# Altium PCB PCB2.PcbDoc
Units mil, origin at the board's own origin, x right, y up, seen from the top; angles counter-clockwise.
Board outline 6000 x 4000 mil, 2 copper layers (Top Layer, Bottom Layer); 70 components, 62 nets, 350 pads, 0 vias.
Unrouted connection lines stored in the file: 244.
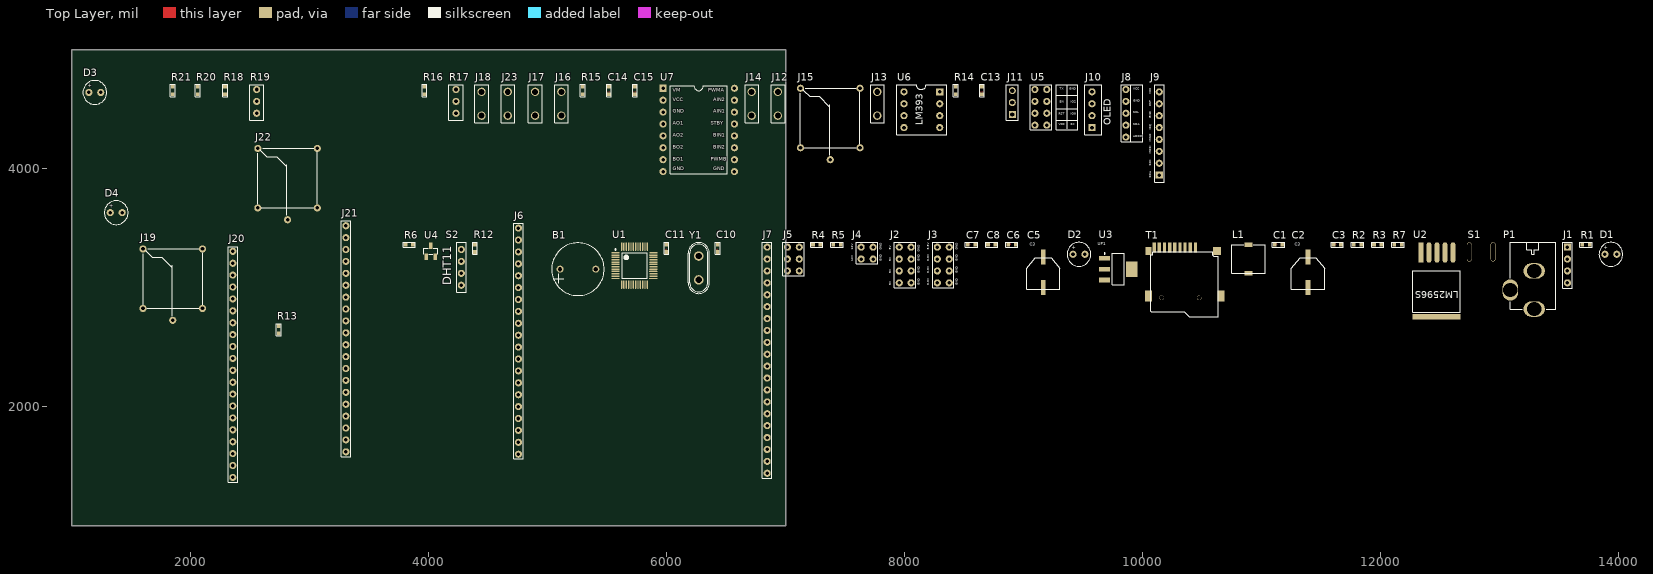
[diagram p0: Top Layer view]
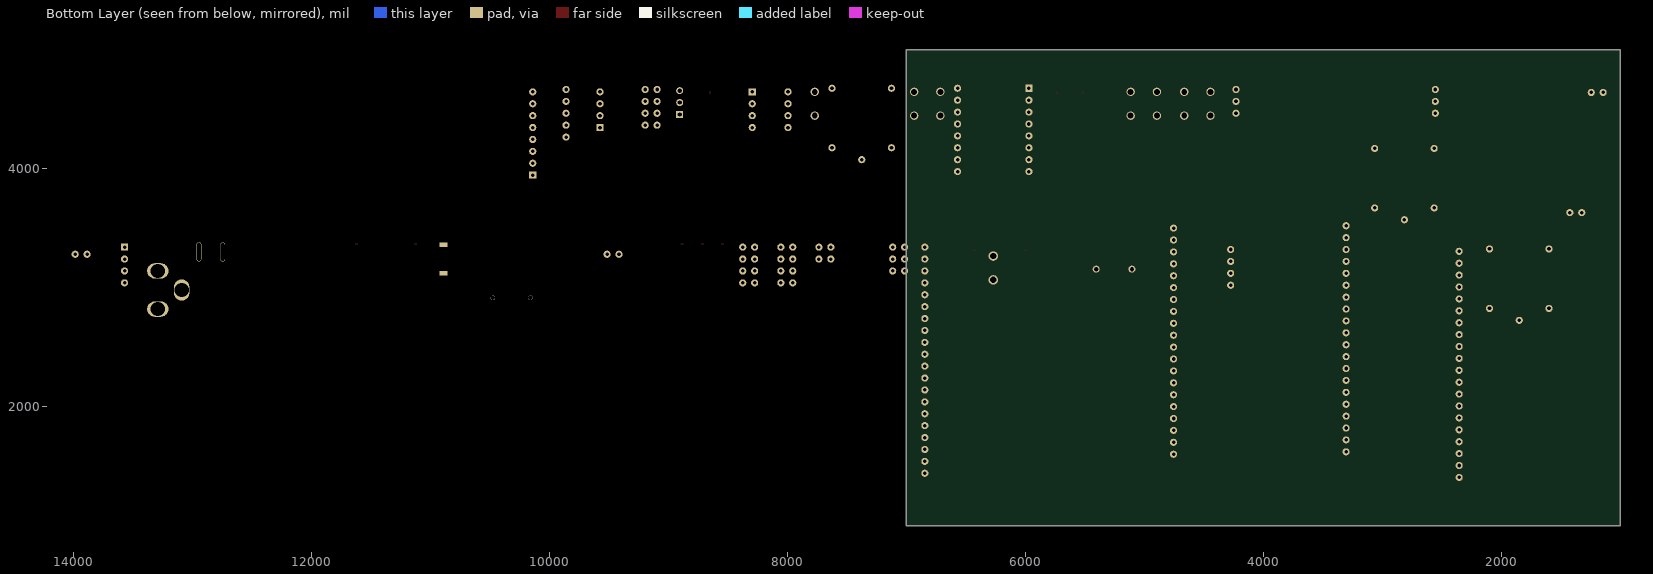
[diagram p1: Bottom Layer view, seen from below]

## Layer stack, top to bottom
Top Solder: solder mask 0.4, Solder Resist, Dk 3.5
Top Layer: signal copper 1.4
Dielectric 1: dielectric 12.6, FR-4, Dk 4.8
Bottom Layer: signal copper 1.4
Bottom Solder: solder mask 0.4, Solder Resist, Dk 3.5

## Board outline
1000,1000 7000,1000 7000,5000 1000,5000

## Design rules (kind name [scope] priority, off if disabled: settings)
Clearance [All] p1: gap=10
PolygonConnect [All] p1: connectstyle=Relief reliefconductorwidth=10 reliefentries=4 polygonreliefangle="90 Angle" airgapwidth=10
RoutingVias [All] p1: holewidth=28 width=50 viastyle="Through Hole" minholewidth=28 minwidth=50 maxholewidth=28 maxwidth=50
SolderMaskExpansion [All] p1: expansion=4
Width [All] p1: maxlimit=10 minlimit=10 preferedwidth=10
29 further rules are at their usual default settings.

## Classes and differential pairs
component class Sheet2: C13 C14 C15 D3 D4 J8 J9 J10 J11 J12 J13 J14 J15 J16 J17 J18 J19 J22 J23 R14 R15 R16 R17 R18 R19 R20 R21 U5 U6 U7
component class Sheet1: B1 C1 C2 C3 C5 C6 C7 C8 C10 C11 D1 D2 J1 J2 J3 J4 J5 J6 J7 J20 J21 L1 P1 R1 R2 R3 R4 R5 R6 R7 R12 R13 S1 S2 T1 U1 U2 U3 U4 Y1

## Components (designator, comment, footprint, x,y, rotation, side; value= is the part's Value field where it differs from the comment)
B1 "BEEP" BEEP-9.5X5.5 5205,3155 r0 top
C1 "104" CAP_0603_FIRE 11110,3360 r0 top
C2 "220UF35V" CAP+_47UF_FIRE 11390,3145 r0 top
C3 "0.1UF" CAP_0603_FIRE 11605,3360 r0 top
C5 "220UF35V" CAP+_47UF_FIRE 9165,3145 r0 top
C6 "0.1UF" CAP_0603_FIRE 8870,3360 r0 top
C7 "22UF" CAP_0603_FIRE 8530,3360 r0 top
C8 "0.1UF" CAP_0603_FIRE 8700,3360 r0 top
C10 "20P" CAP_0603_FIRE 6430,3300 r90 top
C11 "20P" CAP_0603_FIRE 6000,3300 r90 top
C13 "104" CAP_0603_FIRE 8650,4625 r90 top
C14 "104" CAP_0603_FIRE 5515,4625 r90 top
C15 "104" CAP_0603_FIRE 5735,4625 r90 top
D1 "LED" LED_Z 13885,3280 r0 top
D2 "ES2D" LED_Z 9415,3280 r0 top
D3 "LED" LED_Z 1145,4640 r0 top
D4 "LED" LED_Z 1325,3630 r0 top
J1 "SWD" SWD 13570,3340 r0 top
J2 "5V" 5V 7955,3340 r0 top
J3 "3.3V" 3.3V 8275,3340 r0 top
J4 "12V" 12V 7635,3340 r0 top
J5 "BOOT" BOOT 7015,3340 r0 top
J6 "Hander_20" Hander_20 4755,3500 r0 top
J7 "Hander_20" Hander_20 6845,3340 r0 top
J8 "GY-302" GY 9860,4665 r0 top
J9 "RFID" RFID 10140,3945 r90 top
J10 "OLED" OLED 9575,4345 r90 top
J11 "HC-SR501" HDR1X3 8905,4455 r90 top
J12 "K1" port_2 6935,4445 r90 top
J13 "电磁阀" port_2 7770,4445 r90 top
J14 "Port" port_2 6715,4445 r90 top
J15 "relay" relay 7125,4675 r0 top
J16 "电机" port_2 5115,4445 r90 top
J17 "电机" port_2 4895,4445 r90 top
J18 "电磁阀" port_2 4445,4445 r90 top
J19 "relay" relay 1600,3325 r0 top
J20 "Hander_20" Hander_20 2355,3305 r0 top
J21 "Hander_20" Hander_20 3305,3520 r0 top
J22 "relay" relay 2565,4170 r0 top
J23 "电磁阀" port_2 4665,4445 r90 top
L1 "L" L 10890,3360 r0 top
P1 "Power" POWER 13090,2980 r0 top
R1 "1.5K" R_0603 13695,3360 r0 top
R2 "47K" R_0603 11775,3360 r0 top
R3 "47K" R_0603 11945,3360 r0 top
R4 "10K" R_0603 7230,3360 r0 top
R5 "10K" R_0603 7400,3360 r0 top
R6 "RES" R_0603 3805,3360 r0 top
R7 "47K" R_0603 12115,3360 r0 top
R12 "1K" R_0603 4390,3300 r90 top
R13 "10K" R_0603 2740,2615 r90 top
R14 "10K" R_0603 8430,4625 r90 top
R15 "10K" R_0603 5295,4625 r90 top
R16 "1k" R_0603 3965,4625 r90 top
R17 "103" RES_R 4230,4665 r0 top
R18 "1k" R_0603 2290,4625 r90 top
R19 "103" RES_R 2555,4665 r0 top
R20 "10K" R_0603 2060,4625 r90 top
R21 "10K" R_0603 1850,4625 r90 top
S1 "" SWITCH 12745,3300 r0 top
S2 "DHT11" DHT11 4275,3020 r90 top
T1 "TF" TF_CARD 10050,2930 r0 top
U1 "stm32c8t6" LQFP48_N 5730,3185 r0 top
U2 "LM2596" LM2596 12340,3295 r90 top
U3 "AMS1117" AMS-1117-3.3 9795,3155 r0 top
U4 "9014" SOT-23 3980,3260 r0 top
U5 "ESP8266" ESP8266 9095,4665 r0 top
U6 "LM393" LM393 7995,4645 r0 top
U7 "TB6612" TB6612 5970,4675 r0 top
Y1 "8MHZ" XTAL_socket 6270,3165 r90 top

## Footprints (in the part's own frame and the unit in brackets; to place one, negate y for a bottom-side part, rotate by r counter-clockwise, add the part's x,y. Pads: shape width x height; smd on the part's side, far side on the other; paste and mask are expansions set on the pad)
3.3V [mil]
  round 60 hole 30: 1(0,0) 2(0,-100) 3(0,-200) 4(0,-300) 5(100,-300) 6(100,-200) 7(100,-100) 8(100,0)
  silkscreen extent -40,-340 140,40
5V [mil]
  round 60 hole 30: 1(0,0) 2(0,-100) 3(0,-200) 4(0,-300) 5(100,0) 6(100,-100) 7(100,-200) 8(100,-300)
  silkscreen extent -40,-340 140,40
12V [mil]
  round 60 hole 30: 1(0,0) 2(0,-100) 3(100,0) 4(100,-100)
  silkscreen extent -40,-140 140,40
AMS-1117-3.3 [mm]
  rect 2.4x1 smd: 1(-2.9,2.3) 2(-2.9,0) 3(-2.9,-2.3)
  rect 2.4x3.3 smd: 4(2.9,0)
  silkscreen extent -3.02,-3.35 1.3,3.47
BEEP-9.5X5.5 [mm]
  round 1.5 hole 0.9: 1(-2.54,0) 2(5.08,0)
  silkscreen extent -4.34,-5.61 6.88,5.61
BOOT [mil]
  round 60 hole 30: 1(0,0) 2(0,-100) 3(0,-200) 4(100,-200) 5(100,-100) 6(100,0)
  silkscreen extent -40,-240 140,40
CAP+_47UF_FIRE [mm]
  rect 1x3.2 smd: 1(0,2.8) 2(0,-3.683)
  silkscreen extent -3.56,-4.06 3.56,2.7
CAP_0603_FIRE [mm]
  rect 0.8x0.8 smd: 1(0,0) 2(1.6,0)
  silkscreen extent -0.5,-0.5 2.1,0.5
DHT11 [mil]
  round 60 hole 30: 1(0,0) 2(100,0) 3(200,0) 4(300,0)
  silkscreen extent -60,-40 360,40
ESP8266 [mil]
  round 60 hole 30: 1(0,-300) 2(0,-200) 3(0,-100) 4(0,0) 5(100,-300) 6(100,-200) 7(100,-100) 8(100,0)
  silkscreen extent -40,-340 360,40
GY [mil]
  round 60 hole 30: 1(0,0) 2(0,-100) 3(0,-200) 4(0,-300) 5(0,-400)
  silkscreen extent -40,-440 140,40
Hander_20 [mil]
  round 60 hole 30: 1(0,0) 2(0,-100) 3(0,-200) 4(0,-300) 5(0,-400) 6(0,-500) 7(0,-600) 8(0,-700) 9(0,-800) 10(0,-900) 11(0,-1000) 12(0,-1100) 13(0,-1200) 14(0,-1300) 15(0,-1400) 16(0,-1500) 17(0,-1600) 18(0,-1700) 19(0,-1800) 20(0,-1900)
  silkscreen extent -40,-1940 40,40
HDR1X3 [mm] "Connector; Header; 3 Position"
  rect 1.5x1.5 hole 0.9: 1(0,0)
  round 1.5 hole 0.9: 2(2.54,0) 3(5.08,0)
  silkscreen extent -1.27,-1.27 6.35,1.27
L [mm]
  rect 1.8x1 all layers, no hole: 1(0,0) 2(0,-6.096)
  silkscreen extent -3.56,-6.1 3.56,0
LED_Z [mil]
  round 60 hole 30: 1(0,0) 2(100,0)
  silkscreen extent -50,-100 150,100
LM393 [mil]
  round 60 hole 30: 1(0,0) 2(0,-100) 3(0,-200) 4(0,-300) 5(300,-300) 6(300,-200) 7(300,-100)
  rect 60x60 hole 30: 8(300,0)
  silkscreen extent -60,-360 360,60
LM2596 [mil]
  rect 170x42 smd: 1(0,0)
  oval 170x42 smd: 2(0,-67) 3(0,-134) 4(0,-201) 5(0,-268)
  rect 50x400 smd: 6(-540,-130)
  silkscreen extent -500,-330 -155,70
LQFP48_N [mm]
  oval 1.8x0.3 smd: 1(-4.05,2.75) 2(-4.05,2.25) 3(-4.05,1.75) 4(-4.05,1.25) 5(-4.05,0.75) 6(-4.05,0.25) 7(-4.05,-0.25) 8(-4.05,-0.75) 9(-4.05,-1.25) 10(-4.05,-1.75) 11(-4.05,-2.25) 12(-4.05,-2.75) 25(4.05,-2.75) 26(4.05,-2.25) 27(4.05,-1.75) 28(4.05,-1.25) 29(4.05,-0.75) 30(4.05,-0.25) 31(4.05,0.25) 32(4.05,0.75) 33(4.05,1.25) 34(4.05,1.75) 35(4.05,2.25) 36(4.05,2.75)
  oval 0.3x1.8 smd: 13(-2.75,-4.05) 14(-2.25,-4.05) 15(-1.75,-4.05) 16(-1.25,-4.05) 17(-0.75,-4.05) 18(-0.25,-4.05) 19(0.25,-4.05) 20(0.75,-4.05) 21(1.25,-4.05) 22(1.75,-4.05) 23(2.25,-4.05) 24(2.75,-4.05) 37(2.75,4.05) 38(2.25,4.05) 39(1.75,4.05) 40(1.25,4.05) 41(0.75,4.05) 42(0.25,4.05) 43(-0.25,4.05) 44(-0.75,4.05) 45(-1.25,4.05) 46(-1.75,4.05) 47(-2.25,4.05) 48(-2.75,4.05)
  silkscreen extent -4.17,-2.75 2.75,3.57
OLED [mil]
  rect 60x60 hole 30: 1(0,0)
  round 60 hole 30: 2(100,0) 3(200,0) 4(300,0)
  silkscreen extent -60,-80 360,60
port_2 [mil]
  round 70 hole 50: 1(0,0) 2(200,0)
  silkscreen extent -60,-60 260,56
POWER [mil]
  oval 180x130 hole 120: 1(200,160) 3(200,-160)
  oval 130x180 hole 120: 2(0,0)
  silkscreen extent 0,-160 380,400
R_0603 [mm]
  rect 0.8x0.8 smd: 1(0,0) 2(1.6,0)
  silkscreen extent -0.51,-0.51 2.11,0.51
relay [mil]
  round 60 hole 30: 1(0,0) 2(0,-500) 3(250,-600) 4(500,-500) 5(500,0)
  silkscreen extent 0,-564 500,0
RES_R [mil]
  round 60 hole 30: 1(0,0) 2(0,-200) 3(0,-100)
  silkscreen extent -60,-260 60,40
RFID [mil]
  rect 60x60 hole 30: 1(0,0)
  round 60 hole 30: 2(100,0) 3(200,0) 4(300,0) 5(400,0) 6(500,0) 7(600,0) 8(700,0)
  silkscreen extent -60,-40 760,40
SOT-23 [mil]
  rect 30x55 smd: 1(0,0) 2(76,0) 3(38,90)
  silkscreen extent -22,20 98,70
SWD [mil]
  rect 60x60 hole 30: 1(0,0)
  round 60 hole 30: 2(0,-100) 3(0,-200) 4(0,-300)
  silkscreen extent -40,-347 40,40
SWITCH [mil]
  oval 40x160 hole 30 slot 150 at 90 deg: 1(0,0) 2(200,0)
TB6612 [mil]
  rect 60x60 hole 30: 1(0,0)
  round 60 hole 30: 2(0,-100) 3(0,-200) 4(0,-300) 5(0,-400) 6(0,-500) 7(0,-600) 8(0,-700) 9(600,0) 10(600,-100) 11(600,-200) 12(600,-300) 13(600,-400) 14(600,-500) 15(600,-600) 16(600,-700)
  silkscreen extent 60,-720 540,20
TF_CARD [mm]
  rect 0.7x2.1 smd: 1(10,10.35) 2(8.9,10.35) 3(7.8,10.35) 4(6.7,10.35) 5(5.6,10.35) 6(4.5,10.35) 7(3.4,10.35) 8(2.3,10.35) 9(1.2,10.35)
  rect 1.2x1.778 smd: 10(0,9.6)
  rect 1.524x2.413 smd: 11(0,0) 12(15.5,0)
  rrect0% 1.778x1.778 smd: 13(14.6,9.6)
  round 1 hole 1: 14(10.8,-0.4) 15(2.8,-0.4)
  silkscreen extent 0.41,-4.42 14.88,9.4
XTAL_socket [mil]
  round 80 hole 53: 1(100,0) 2(-100,0)
  silkscreen extent -215,-89 214,89

## Part data
C1 C3 C6 C7 C8 C10 C11 C13 C14 C15: library part Capacitance
C2 C5: library part Capactiance+
D2: library part LED
J12 J13 J16 J17 J18 J23: library part port_2
R1 R2 R3 R4 R5 R7 R12 R13 R14 R15 R16 R18 R20 R21: library part RES
R17 R19: library part RES_R
S1: library part Switch
Y1: library part XTAL

## Nets (pads, with @x,y where several pads share a name; then routed paths per layer and width w, separated by ;. In a path a pad name is that pad's centre, name@x,y a point inside that pad or via, vN(x,y) a via of type N, cw(c..) or ccw(c..) an arc to the next point about the centre after c; other vN are vias at no path point)
3.3V: B1.1 C1.2 C7.2 C8.2 C13.1 D1.1 D3.1 D4.1 J1.4 J3.1 J3.2 J3.3 J3.4 J5.1 J5.6 J6.18 J7.1 J7.3 J8.1 J9.8 J10.1 J11.3 J20.18 J21.1 R2.2 R3.2 R6.1 R7.2 R14.2 R15.1 R17.2 R19.2 R20.1 R21.1 S2.1 T1.4 U1.9 U1.24 U1.36 U1.48 U3.2 U5.1 U6.8 U7.1 U7.2 U7.11 U7.12 U7.14
5V: C5.1 C6.1 J2.1 J2.2 J2.3 J2.4 J21.3 L1.2 U2.4 U3.3
12V: C2.1 C3.2 J4.1 J4.2 J15.3 J19.3 J22.3 S1.2 U2.1
BEEP: J7.16 J21.16 R12.1 U1.29
BOOT0: R4.1 U1.44
BOOT1: R5.2 U1.20
FIRE_IN: C15.1 J6.6 J14.2 J20.6 R15.2 U1.11 U6.5
FIRE_IN2: R17.3 U6.6
FIRE_OUT: J7.9 J21.9 R16.2 R20.2 U1.40 U6.7
GND: C1.1 C2.2 C3.1 C5.2 C6.2 C7.1 C8.1 C10.1 C11.1 C13.2 C14.1 C15.2 D2.1 J1.1 J2.5 J2.6 J2.7 J2.8 J3.5 J3.6 J3.7 J3.8 J4.3 J4.4 J5.3 J5.4 J6.19 J6.20 J7.2 J8.2 J9.6 J10.2 J11.1 J12.2 J13.2 J14.1 J15.4 J18.2 J19.4 J20.19 J20.20 J21.2 J22.4 J23.2 P1.1 P1.2 R1.2 R13.1 R17.1 R19.1 S2.4 T1.3 T1.6 U1.8 U1.23 U1.35 U1.47 U2.3 U2.5 U3.1 U4.2 U5.8 U6.4 U7.3 U7.8 U7.10 U7.13 U7.16
GY_INT: J7.4 J21.4 U1.46
I2C_SCL: J7.7 J8.3 J10.3 J21.7 U1.42
I2C_SDA: J7.6 J8.4 J10.4 J21.6 U1.43
NetB1_2: B1.2 U4.3
NetD1_2: D1.2 R1.1
NetD2_2: D2.2 L1.1 U2.2
NetD3_2: D3.2 R16.1
NetD4_2: D4.2 R18.1
NetJ5_2: J5.2 R4.2
NetJ5_5: J5.5 R5.1
NetJ13_1: J13.1 J15.5
NetJ16_1: J16.1 U7.4
NetJ16_2: J16.2 U7.5
NetJ17_1: J17.1 U7.6
NetJ17_2: J17.2 U7.7
NetJ18_1: J18.1 J19.5
NetJ22_5: J22.5 J23.1
NetP1_3: P1.3 S1.1
NetR12_2: R12.2 R13.2 U4.1
NRST: J6.17 J20.17 U1.7
OSC_IN: C10.2 U1.5 Y1.2
OSC_OUT: C11.2 U1.6 Y1.1
PA0: C14.2 J6.5 J12.1 J20.5 R14.1 U1.10 U6.3
PA2: J6.7 J20.7 U1.12 U5.5
PA3: J6.8 J20.8 U1.13 U5.4
PA4: J6.9 J9.1 J20.9 U1.14
PA5: J6.10 J9.2 J20.10 R2.1 T1.5 U1.15
PA6: J6.11 J9.4 J20.11 T1.7 U1.16
PA7: J6.12 J9.3 J20.12 R3.1 T1.2 U1.17
PA9: J7.15 J21.15 U1.30
PA10: J7.14 J21.14 U1.31
PA11: J7.13 J21.13 R6.2 S2.2 U1.32
PA12: J7.12 J21.12 U1.33
PA15: J7.11 J21.11 U1.38
PB0: J6.13 J20.13 U1.18 U7.9
PB1: J6.14 J20.14 U1.19 U7.15
PB3: J7.10 J21.10 R18.2 R21.2 U1.39 U6.1
PB5: J7.8 J21.8 U1.41
PB8: J7.5 J21.5 R7.1 T1.1 U1.45
PB10: J6.15 J9.5 J20.15 U1.21
PB11: J6.16 J9.7 J20.16 U1.22
PB12: J7.20 J15.2 J21.20 U1.25
PB13: J7.19 J19.2 J21.19 U1.26
PB14: J7.18 J21.18 J22.2 U1.27
PB15: J7.17 J11.2 J21.17 U1.28
PC13: J6.2 J8.5 J20.2 U1.2
PC14: J6.3 J20.3 U1.3 U5.2
PC15: J6.4 J20.4 U1.4 U5.3
SOIL_IN2: R19.3 U6.2
SWCLK: J1.2 U1.37
SWIO: J1.3 U1.34
VBAT: J6.1 J20.1 U1.1
pads on no net: J15.1 J19.1 J22.1 S2.3 T1.8 T1.9 T1.10 T1.11 T1.12 T1.13 T1.14 T1.15 U2.6 U3.4 U5.6 U5.7

## Text inside footprints (layer, text, board x,y; h text height)
C2: Top Overlay "C3" at 11278.7,3352.61 h25
C3: Top Layer "C1" at 11605.29,3354.37 h15.75
C5: Top Overlay "C3" at 9053.7,3352.61 h25
C6: Top Layer "C1" at 8870.29,3354.37 h15.75
C7: Top Layer "C1" at 8530.29,3354.37 h15.75
C8: Top Layer "C1" at 8700.29,3354.37 h15.75
C10: Top Layer "C1" at 6435.63,3300.29 h15.75 r90
C11: Top Layer "C1" at 6005.63,3300.29 h15.75 r90
C13: Top Layer "C1" at 8655.63,4625.29 h15.75 r90
C14: Top Layer "C1" at 5520.63,4625.29 h15.75 r90
C15: Top Layer "C1" at 5740.63,4625.29 h15.75 r90
D1: Top Overlay "+" at 13875,3310 h50
D2: Top Overlay "+" at 9405,3310 h50
D3: Top Overlay "+" at 1135,4670 h50
D4: Top Overlay "+" at 1315,3660 h50
J2: Top Overlay "GND" at 8135,3020 h30 r90; Top Overlay "GND" at 8135,3120 h30 r90; Top Overlay "GND" at 8135,3220 h30 r90; Top Overlay "GND" at 8135,3300 h30 r90
J3: Top Overlay "GND" at 8455,3320 h30 r90; Top Overlay "GND" at 8455,3220 h30 r90; Top Overlay "GND" at 8455,3120 h30 r90; Top Overlay "GND" at 8455,3020 h30 r90
J4: Top Overlay "GND" at 7815,3220 h30 r90; Top Overlay "GND" at 7815,3320 h30 r90
J8: Top Overlay "GND" at 9920,4555 h30; Top Overlay "VCC" at 9920,4655 h30; Top Overlay "SCL" at 9920,4455 h30; Top Overlay "SDA" at 9920,4355 h30; Top Overlay "ADDR" at 9920,4255 h30
J9: Top Overlay "VCC" at 10080,4625 h30 r90; Top Overlay "RST" at 10080,4525 h30 r90; Top Overlay "GND" at 10080,4425 h30 r90; Top Overlay "IRQ" at 10080,4325 h30 r90; Top Overlay "MISO" at 10080,4225 h30 r90; Top Overlay "MOSI" at 10080,4125 h30 r90; Top Overlay "SCK" at 10080,4025 h30 r90; Top Overlay "SDA" at 10080,3925 h30 r90
U2: Top Overlay "LM2596S" at 12655,2990 h100 r180
U3: Top Overlay "UP1" at 9622.76,3356.7 h25
U5: Top Overlay "VCC" at 9295,4355 h30; Top Overlay "RST" at 9295,4445 h30; Top Overlay "EN" at 9305,4545 h30; Top Overlay "TX" at 9305,4655 h30; Top Overlay "RX" at 9395,4355 h30; Top Overlay "IO0" at 9395,4445 h30; Top Overlay "IO2" at 9395,4545 h30; Top Overlay "GND" at 9385,4655 h30
U7: Top Overlay "GND" at 6390,3975 h50; Top Overlay "PWMB" at 6370,4055 h50; Top Overlay "BIN2" at 6390,4155 h50; Top Overlay "BIN1" at 6390,4255 h50; Top Overlay "STBY" at 6370,4355 h50; Top Overlay "AIN1" at 6390,4455 h50; Top Overlay "AIN2" at 6390,4555 h50; Top Overlay "PWMA" at 6350,4635 h50; Top Overlay "GND" at 6050,3975 h50; Top Overlay "BO1" at 6050,4055 h50; Top Overlay "BO2" at 6050,4155 h50; Top Overlay "AO2" at 6050,4255 h50; Top Overlay "AO1" at 6050,4355 h50; Top Overlay "GND" at 6050,4455 h50; Top Overlay "VM" at 6050,4635 h50; Top Overlay "VCC" at 6050,4555 h50